# Altium PCB 电机驱动PCB.PcbDoc
Units mm, origin at the board's own origin, x right, y up, seen from the top; angles counter-clockwise.
Board outline 66.29 x 27.3 mm, 4 copper layers (Top, GND02, PWR03, BOTTOM), stack 0.603 mm thick; 45 components, 38 nets, 215 pads, 116 vias.
Unrouted connection lines stored in the file: 1.
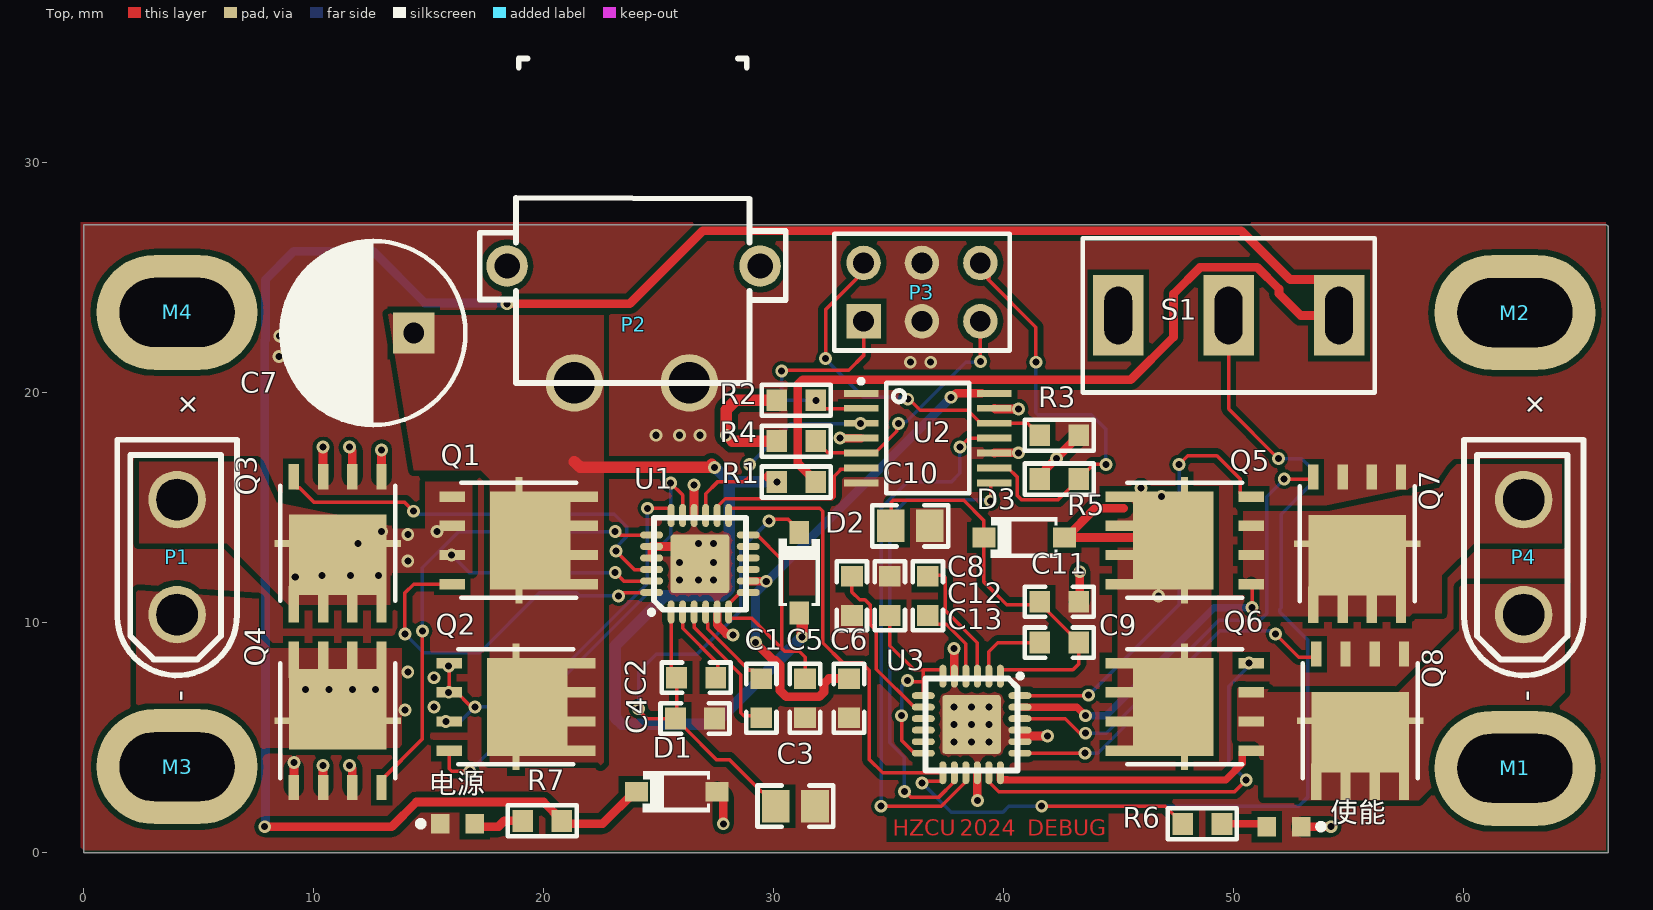
[diagram p0: Top view]
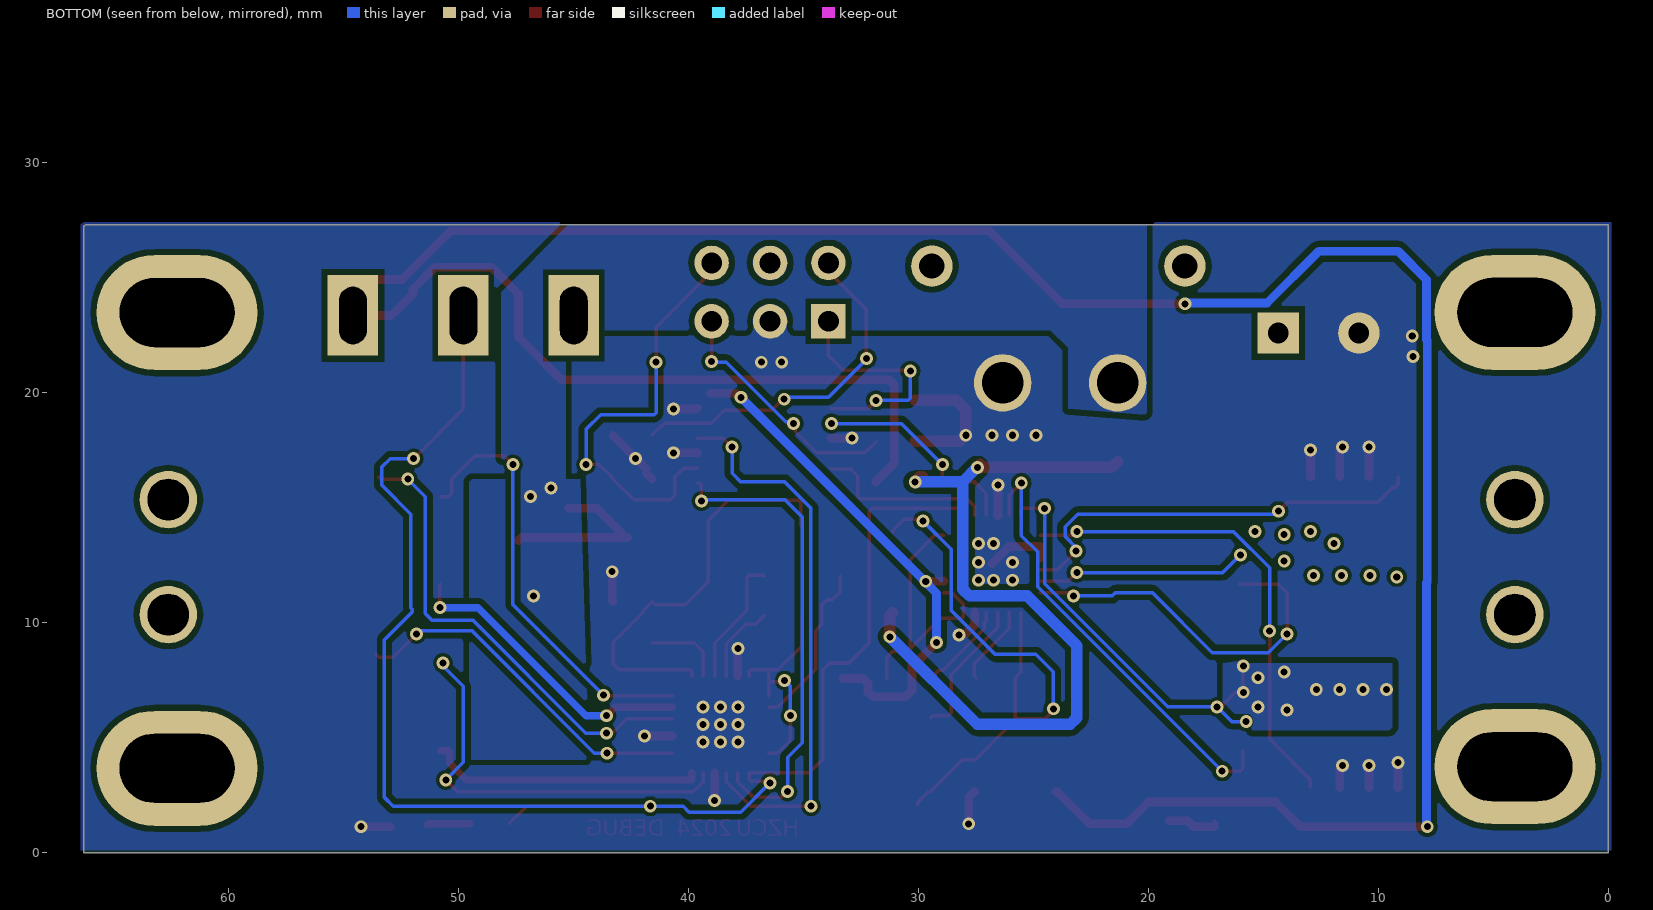
[diagram p1: BOTTOM view, seen from below]
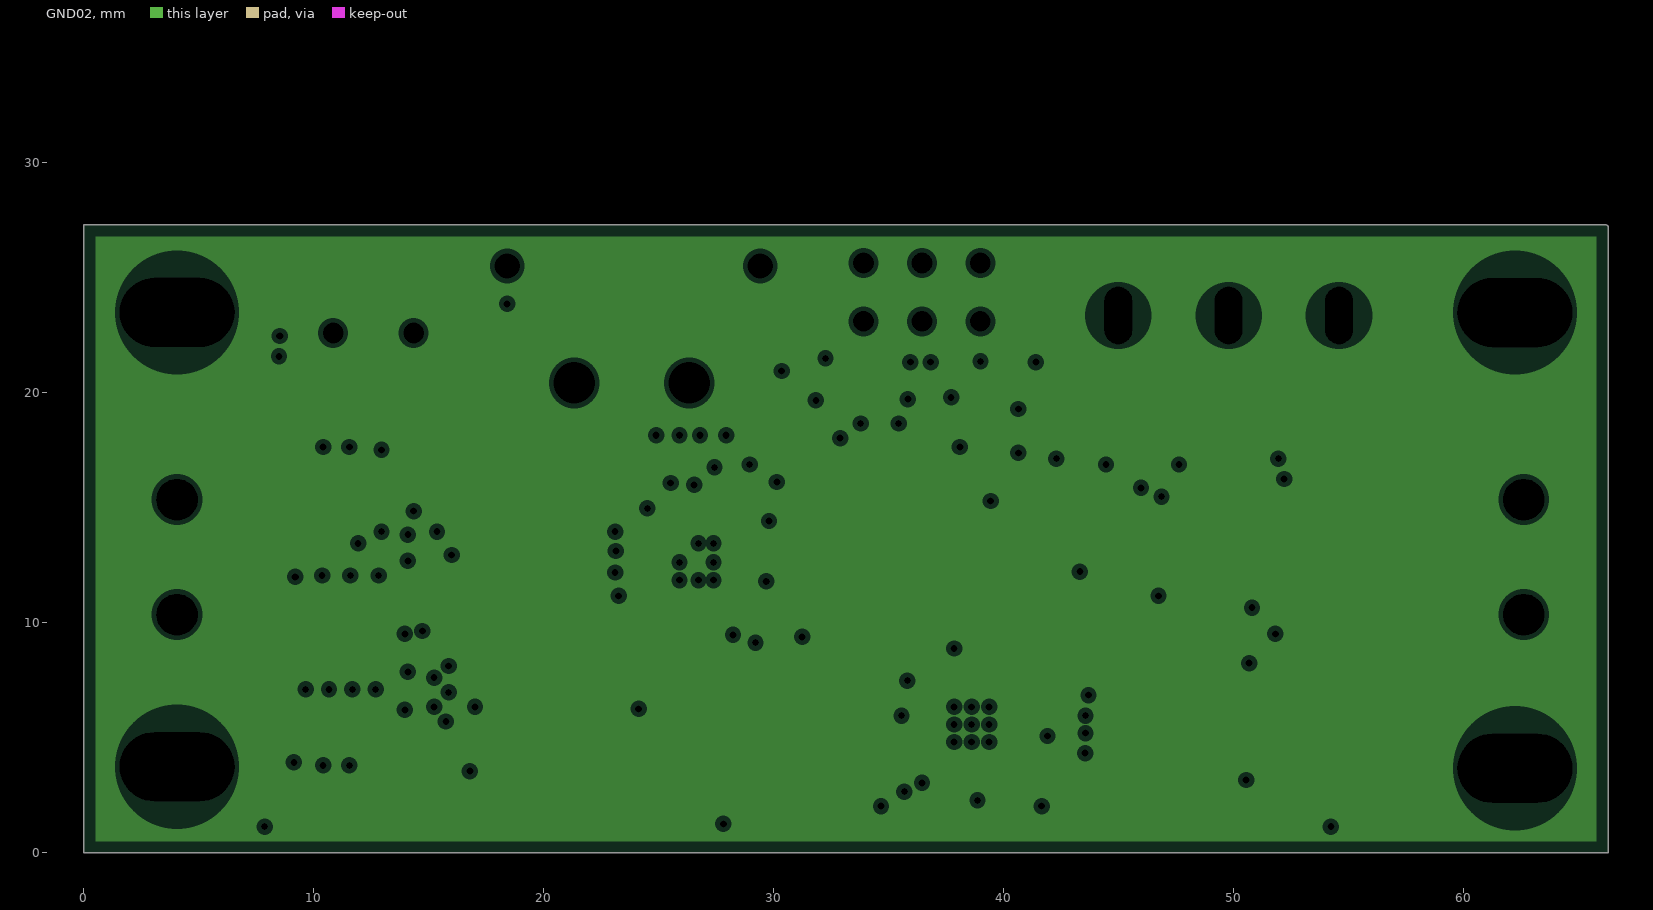
[diagram p2: GND02, clearances drawn from the general rule]
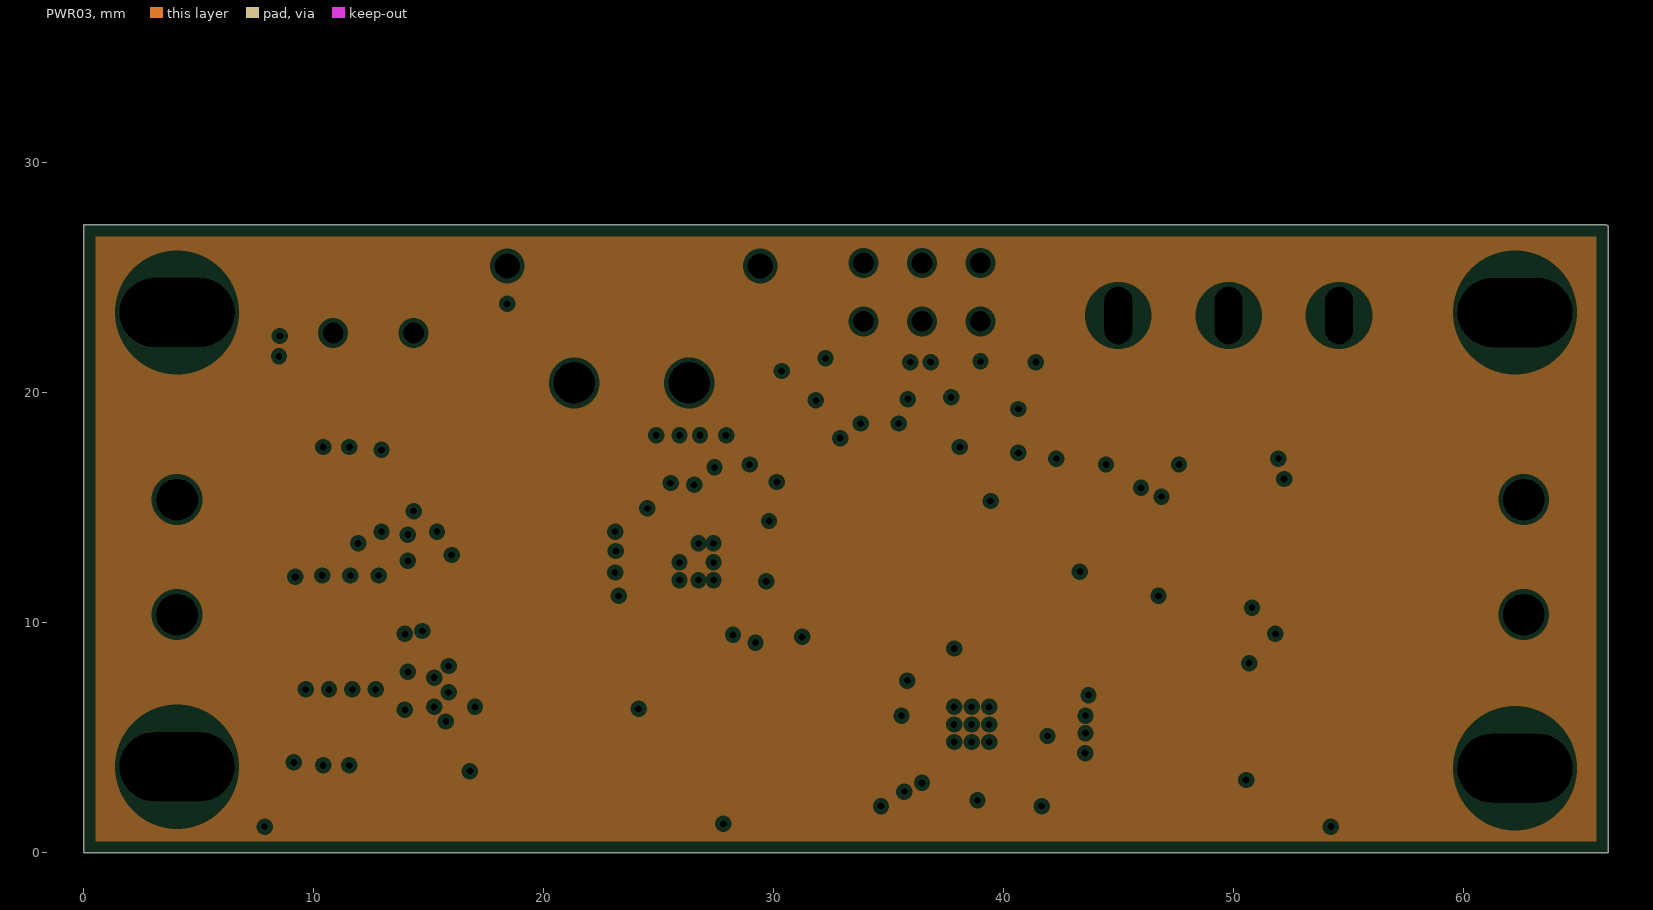
[diagram p3: PWR03, clearances drawn from the general rule]
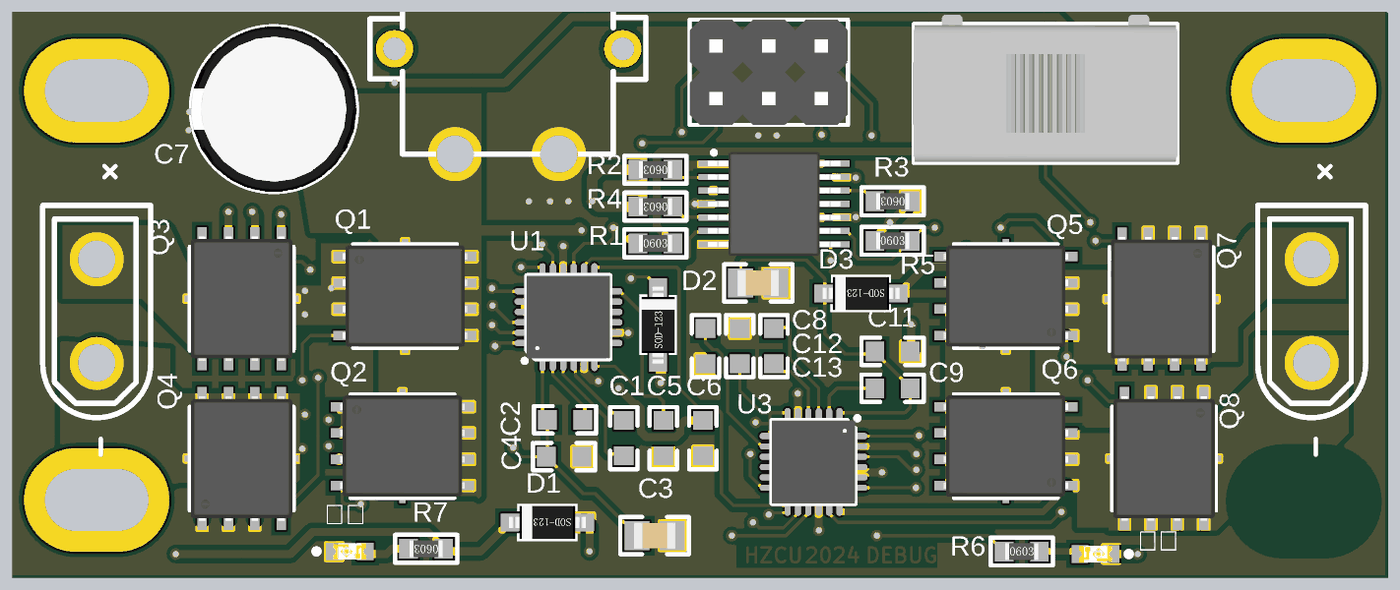
[diagram p4: 3D render of the assembled board from above, using the file's embedded part models]

## Layer stack, top to bottom
Top Solder: solder mask 0.0102, Solder Resist, Dk 3.5
Top: signal copper 0.0356
Dielectric 2: prepreg 0.0711, PP-006, Dk 4.1
GND02: plane copper 0.035
Dielectric 1: dielectric 0.32, FR-4, Dk 4.8
PWR03: plane copper 0.035
Dielectric 3: prepreg 0.0711, PP-006, Dk 4.1
BOTTOM: signal copper 0.0356
Bottom Solder: solder mask 0.0102, Solder Resist, Dk 3.5

## Board outline
0,0 0,27.305 66.19,27.305 66.294,27.25 66.294,0

## Design rules (kind name [scope] priority, off if disabled: settings)
Clearance [All] p1: gap=0.152 ignorepadtopadclearanceinfootprint=TRUE except(0.254: Arc-Fill Arc-Poly Arc-Region Track-Fill Track-Poly Track-Region SMDPad-Fill SMDPad-Poly SMDPad-Region THPad-Fill THPad-Poly THPad-Region Fill-Fill Fill-Poly Fill-Region Poly-Poly Poly-Region Region-Region)
PlaneClearance [All] p1: clearance=0.203
PlaneConnect [All] p1: planeconnectstyle=Relief reliefexpansion=0.508 reliefentries=4 reliefconductorwidth=0.254 reliefairgap=0.254
PolygonConnect [All] p1: connectstyle=Direct reliefconductorwidth=0.254 reliefentries=4 polygonreliefangle="90 Angle" airgapwidth=0.254
RoutingVias [All] p1: holewidth=0.305 width=0.559 viastyle="Through Hole" minholewidth=0.305 minwidth=0.559 maxholewidth=0.305 maxwidth=0.559
SolderMaskExpansion [All] p1: expansion=0.102 istentingtop=FALSE
Width POWER [InNetClass('POWER')] p1: maxlimit=1.524 minlimit=0.254 preferedwidth=0.381 toplayer_minwidth=0.381 minimp=50.000000 maximp=50.000000 favimp=50.000000
Width [All] p2: maxlimit=0.152 minlimit=0.152 preferedwidth=0.152 minimp=50.000000 maximp=50.000000 favimp=50.000000
28 further rules are at their usual default settings.

## Classes and differential pairs
net class POWER: 3V3 +12 DVDD GND
component class 电机驱动原理图: C1 C2 C3 C4 C5 C6 C7 C8 C9 C10 C11 C12 C13 D1 D2 D3 M1 M2 M3 M4 P2 P3 P4 Q3 Q5 Q6 Q7 Q8 R1 R2 R3 R4 R5 R6 R7 S1 U1 U2 U3 使能 电源

## Components (designator, comment, footprint, x,y, rotation, side; value= is the part's Value field where it differs from the comment)
C1 "100nF ±10% 50V" CAPC1608[0603]S-N 29.464,6.731 r270 top value=100nF
C2 "1uF ±10% 25V" CAPC1608[0603]S-N 26.631,7.62 r180 top value=1uF
C3 "10uF ±10% 25V" CAPC2012[0805]S-N 30.949,2.032 r0 top value=10uF
C4 "100nF ±10% 50V" CAPC1608[0603]S-N 26.582,5.842 r0 top value=100nF
C5 "1uF ±10% 25V" CAPC1608[0603]S-N 31.369,6.731 r90 top value=1uF
C6 "1uF ±10% 25V" CAPC1608[0603]S-N 33.274,6.731 r90 top value=1uF
C7 "220uF 25V" CAPPR3.5-8X11.5 12.601,22.606 r180 top value=220uF
C8 "100nF ±10% 50V" CAPC1608[0603]S-N 36.703,11.176 r90 top value=100nF
C9 "1uF ±10% 25V" CAPC1608[0603]S-N 42.418,9.144 r0 top value=1uF
C10 "10uF ±10% 25V" CAPC2012[0805]S-N 35.941,14.224 r0 top value=10uF
C11 "100nF ±10% 50V" CAPC1608[0603]S-N 42.418,10.922 r0 top value=100nF
C12 "1uF ±10% 25V" CAPC1608[0603]S-N 35.052,11.176 r270 top value=1uF
C13 "1uF ±10% 25V" CAPC1608[0603]S-N 33.401,11.176 r90 top value=1uF
D1 "BZT52C3V3" SOD-123-L 25.781,2.667 r180 top
D2 "1N5819" SOD-123-L 31.115,12.192 r90 top
D3 "1N5819" SOD-123-L 40.894,13.716 r180 top
M1 "MountHole" M3-MountSlot#1 -48.522,3.104 r0 top
M2 "MountHole" M3-MountSlot#2 61.794,3.166 r0 top
M3 "MountHole" M3-MountSlot#3 3.628,3.801 r0 top
M4 "MountHole" M3-MountSlot#2 3.628,3.171 r0 top
P1 "" XT30UPB-M 4.064,13.208 r90 top
P2 "" CONN-TH_XT30PW-F 23.876,26.924 r0 top
P3 "Header 3X2" HDR2X3 33.909,23.114 r0 top
P4 "" XT30UPB-M 62.611,13.208 r90 top
Q1 "TPH1R403NL" DFN5x6 18.923,13.589 r270 top
Q2 "TPH1R403NL" DFN5x6 18.796,6.35 r270 top
Q3 "TPH1R403NL" DFN5x6 11.049,13.462 r180 top
Q4 "TPH1R403NL" DFN5x6 11.049,5.75 r0 top
Q5 "TPH1R403NL" DFN5x6 47.871,13.589 r90 top
Q6 "TPH1R403NL" DFN5x6 47.871,6.35 r90 top
Q7 "TPH1R403NL" DFN5x6 55.372,13.445 r180 top
Q8 "TPH1R403NL" DFN5x6 55.499,5.75 r180 top
R1 "2.2K ±1%" RESC1608[0603]S-N 30.988,16.129 r0 top value=2.2K
R2 "10K ±1%" RESC1608[0603]S-N 30.988,19.685 r180 top value=10K
R3 "10K ±1%" RESC1608[0603]S-N 42.418,18.161 r180 top value=10K
R4 "10K ±1%" RESC1608[0603]S-N 30.988,17.907 r180 top value=10K
R5 "10K ±1%" RESC1608[0603]S-N 42.418,16.256 r0 top value=10K
R6 "330R ±1%" RESC1608[0603]S-N 48.641,1.264 r0 top value=330R
R7 "1K ±1%" RESC1608[0603]S-N 19.939,1.397 r180 top value=1K
S1 "SW-SPDT" SS12D10 49.784,23.368 r0 top
U1 "DRV8701E" QFN24-4x4 26.797,12.573 r90 top
U2 "SN74HC125PWR" TSSOP-14 36.703,18.034 r0 top
U3 "DRV8701E" QFN24-4x4 38.608,5.588 r270 top
使能 "Blue" LEDC1608(0603) 52.197,1.143 r180 top (schematic designator LED1)
电源 "Blue" LEDC1608(0603) 16.256,1.27 r0 top (schematic designator LED2)

## Footprints (in the part's own frame and the unit in brackets; to place one, negate y for a bottom-side part, rotate by r counter-clockwise, add the part's x,y. Pads: shape width x height; smd on the part's side, far side on the other; paste and mask are expansions set on the pad)
CAPC1608[0603]S-N [mm]
  rect 0.9x0.95 smd: 1(-0.85,0) 2(0.85,0)
  silkscreen extent -1.5,-0.66 1.5,0.66, body extent -0.8,-0.41 0.8,0.41, height 0.79
CAPC2012[0805]S-N [mm]
  rect 1.2x1.4 smd: 1(-0.85,0) 2(0.85,0)
  silkscreen extent -1.65,-0.9 1.65,0.9, body extent -1,-0.63 1,0.62, height 1.25
CAPPR3.5-8X11.5 [mm]
  rect 1.8x1.8 hole 0.9: 1(-1.75,0)
  round 1.8 hole 0.9: 2(1.75,0)
  silkscreen extent -4,-4.01 4,4, body extent -4,-3.98 4,3.98, height 11.5
CONN-TH_XT30PW-F [mm]
  round 2.5 hole 1.8 paste+0 mask+0.051: 1(-2.54,-6.487) 2(2.46,-6.487)
  round 1.8 hole 1.1 paste+0 mask+0.051: 3(5.539,-1.407) 4(-5.461,-1.407)
  silkscreen extent -6.65,-6.49 6.65,7.61
DFN5x6 [mm]
  rect 0.45x1.6 smd: 1(-1.905,2.65) 1(-0.635,2.65) 1(0.635,2.65) 1(1.905,2.65)
  rect 5.5x0.3 smd: 1(0,0)
  rect 4.25x3.5 smd: 1(0,0.5)
  rect 0.45x1.1 smd: 2(1.905,-2.9) 3(-1.905,-2.9) 3(-0.635,-2.9) 3(0.635,-2.9)
  silkscreen extent -2.5,-2.5 2.5,2.5, body extent -2.45,-3 2.45,3, height 1
HDR2X3 [mm]
  rect 1.5x1.5 hole 0.9: 1(0,0)
  round 1.5 hole 0.9: 2(0,2.54) 3(2.54,0) 4(2.54,2.54) 5(5.08,0) 6(5.08,2.54)
  silkscreen extent -1.27,-1.27 6.35,3.81, body extent -1.27,-1.27 6.35,3.81, height 8.54
LEDC1608(0603) [mm]
  rect 0.8x0.85 smd: A(0.75,0) C(-0.75,0)
  silkscreen extent -1.73,-0.12 -1.48,0.12, body extent -0.8,-0.4 0.8,0.4, height 0.64
M3-MountSlot#1 [mm]
  oval 7x5 hole 3 slot 5 at 0 deg: 1(110.752,0.579)
M3-MountSlot#2 [mm]
  oval 7x5 hole 3 slot 5 at 0 deg: 1(0.436,20.329)
M3-MountSlot#3 [mm]
  oval 7x5 hole 3 slot 5 at 0 deg: 1(0.436,-0.051)
QFN24-4x4 [mm]
  rrect10% 2.55x2.55 smd: 0(0,0)
  oval 1x0.3 smd: 1(-2.1,1.25) 2(-2.1,0.75) 3(-2.1,0.25) 4(-2.1,-0.25) 5(-2.1,-0.75) 6(-2.1,-1.25) 13(2.1,-1.25) 14(2.1,-0.75) 15(2.1,-0.25) 16(2.1,0.25) 17(2.1,0.75) 18(2.1,1.25)
  oval 0.3x1 smd: 7(-1.25,-2.1) 8(-0.75,-2.1) 9(-0.25,-2.1) 10(0.25,-2.1) 11(0.75,-2.1) 12(1.25,-2.1) 19(1.25,2.1) 20(0.75,2.1) 21(0.25,2.1) 22(-0.25,2.1) 23(-0.75,2.1) 24(-1.25,2.1)
  silkscreen extent -2.21,-2 2,2.21, body extent -2,-2 2,2, height 0.9
RESC1608[0603]S-N [mm]
  rect 0.9x0.95 smd: 1(-0.85,0) 2(0.85,0)
  silkscreen extent -1.5,-0.67 1.5,0.67, body extent -0.8,-0.4 0.8,0.4, height 0.45
SOD-123-L [mm]
  rect 1x0.85 smd: A(-1.75,0) K(1.75,0)
  silkscreen extent -1.45,-0.9 1.47,0.9, body extent -1.85,-0.8 1.85,0.8, height 1.2
SS12D10 [mm]
  rect 2.2x3.5 hole 1.2 slot 2.5 at 90 deg mask+0.07: 1(-4.8,0) 2(0,0) 3(4.8,0)
  silkscreen extent -6.35,-3.35 6.35,3.35, body extent -6.4,-3.3 6.35,3.8, height 12.5
TSSOP-14 [mm]
  rect 1.5x0.3 smd mask+0.07: 1(-2.9,1.95) 2(-2.9,1.3) 3(-2.9,0.65) 4(-2.9,0) 5(-2.9,-0.65) 6(-2.9,-1.3) 7(-2.9,-1.95) 8(2.9,-1.95) 9(2.9,-1.3) 10(2.9,-0.65) 11(2.9,0) 12(2.9,0.65) 13(2.9,1.3) 14(2.9,1.95)
  silkscreen extent -2.99,-2.4 1.8,2.57, body extent -3.2,-2.5 3.2,2.5, height 1.13
XT30UPB-M [mm]
  round 2.5 hole 1.8 slot 1.805 at 0 deg paste+0 mask+0.051: 1(2.155,0) 2(-2.845,0)
  silkscreen extent -5.49,-2.6 4.76,2.6

## Part data
C1 C4 C8 C11: library part Cap-Chip_1, "贴片电容", Tolerance=±10%, Voltage=50V, Price(RMB)=0.000, Published=8-Jun-2000, Publisher="Altium Limited", Revision="July-2002: Re-released for DXP Platform."
C2 C5 C6 C9 C12 C13: library part Cap-Chip_2, "贴片电容", Tolerance=±10%, Voltage=25V, Price(RMB)=0.000, Published=8-Jun-2000, Publisher="Altium Limited", Revision="July-2002: Re-released for DXP Platform."
C3 C10: library part Cap-Chip, "贴片电容", Tolerance=±10%, Voltage=25V, Price(RMB)=0.000, Published=8-Jun-2000, Publisher="Altium Limited", Revision="July-2002: Re-released for DXP Platform."
C7: library part Cap-Elect, "Polarized Capacitor (Radial)", Voltage=25V, Price(RMB)=0.000, Published=8-Jun-2000, Publisher="Altium Limited", Revision="July-2002: Re-released for DXP Platform."
D1: library part "Diode Zen", "3.3V稳压二极管 SOD-123", Price(RMB)=0.000, Published=8-Jun-2000, Publisher="Altium Limited", Revision="July-2002: Re-released for DXP Platform."
D2 D3: library part "Diode Schottky", "肖特基二极管 Diode", Imax=500mA, PartNumber=1N5819, Price(RMB)=0.000, Published=8-Jun-2000, Publisher="Altium Limited", Revision="July-2002: Re-released for DXP Platform."
M1 M2 M3 M4: "固定孔"
P1 P4: library part XT30, "电机接口"
P2: library part XT30PW-F, "XT30电源接口"
P3: "Header, 3-Pin, Dual row", LatestRevisionDate=17-Jul-2002, LatestRevisionNote="Re-released for DXP Platform.", Price(RMB)=0.00, Publisher="Altium Limited"
Q1 Q2 Q3 Q4 Q5 Q6 Q7 Q8: "东芝 N沟 MOS"
R1: library part Res-Chip, "贴片电阻", Tolerance=±1%, Price(RMB)=0.000, Published=8-Jun-2000, Publisher="Altium Limited", Revision="July-2002: Re-released for DXP Platform."
R2 R3 R4 R5: library part Res-Chip_1, "贴片电阻", Tolerance=±1%, Price(RMB)=0.000, Published=8-Jun-2000, Publisher="Altium Limited", Revision="July-2002: Re-released for DXP Platform."
R6: library part Res-Chip_3, "贴片电阻", Tolerance=±1%, Price(RMB)=0.000, Published=8-Jun-2000, Publisher="Altium Limited", Revision="July-2002: Re-released for DXP Platform."
R7: library part Res-Chip_2, "贴片电阻", Tolerance=±1%, Price(RMB)=0.000, Published=8-Jun-2000, Publisher="Altium Limited", Revision="July-2002: Re-released for DXP Platform."
S1: "单刀双掷开关 3脚船型、钮子、拨动开关 SPDT Subminiature Toggle Switch", Price(RMB)=0.000, Published=24-Mar-1999, Publisher="Altium Limited"
U1 U3: "DRV8701E Ti全桥驱动芯片"
U2: "三态输出的四路缓冲器 TSSOP-20"
使能 电源: library part "LED Chip Blue", "Typical Chip LED", Color=Blue, Price(RMB)=0.00, Published=8-Jun-2000, Publisher="Altium Limited", Revision="July-2002: Re-released for DXP Platform."

## Via types
v1: diameter 0.559, hole 0.305, Top to BOTTOM, tented both sides, 116 vias

## Nets (pads, with @x,y where several pads share a name; then routed paths per layer and width w, separated by ;. In a path a pad name is that pad's centre, name@x,y a point inside that pad or via, vN(x,y) a via of type N, cw(c..) or ccw(c..) an arc to the next point about the centre after c; other vN are vias at no path point)
3V3: D1.K R1.2 R7.1 S1.3 | length 125.1
  Top w0.381: v1(7.874,1.143) 13.399,1.143 14.471,2.215 19.996,2.215 20.789,1.422 R7.1 20.916,1.27 22.559,1.27 23.956,2.667 D1.K ; v1(18.415,23.876) 23.749,23.876 26.924,27.051 50.334,27.051 52.457,24.928 53.675,24.928 54.584,24.018 S1.3 52.913,23.368 51.969,24.311 51.969,24.518 51.026,25.461 48.542,25.461 47.384,24.303 47.384,22.433 45.525,20.574 31.268,20.574 31.045,20.351 31.045,16.947 31.838,16.154 R1.2
  BOTTOM w0.381: v1(7.874,1.143) 7.907,1.176 7.907,11.741 7.874,11.774 7.874,22.29 7.907,22.322 7.907,24.925 9.144,26.162 12.592,26.162 14.846,23.908 18.383,23.908 v1(18.415,23.876)
+12: C7.1 D2.A D3.A P2.1 Q1.1 Q2.1 Q5.1 Q6.1 R1.1 | length 42.8
  Top w0.381: D3.A D3.A@42.719,13.716 ; 45.212,14.986 43.989,14.986 D3.A@42.719,13.716 ; Q5.1@47.371,13.589 47.244,13.716 D3.A@42.719,13.716
  Top w0.5: 21.336,17.018 21.59,16.764 v1(27.432,16.764) v1@27.305,16.891 ; P2.1 P2.1@21.695,20.078 ; R1.1@29.801,16.354 29.938,16.354 30.138,16.154 v1(30.138,16.129) ; D2.A 31.242,10.315 v1(31.242,9.398)
  BOTTOM w0.5: v1(27.432,16.764) 27.448,16.764 28.083,16.129 ; v1(30.138,16.129) 28.083,16.129 ; v1(31.242,9.398) 27.432,5.588 23.407,5.588 23.114,5.881 23.114,9.017 25.273,11.176 27.774,11.176 28.067,11.469 28.067,16.113 28.083,16.129
  other v1: 46.736,11.176 46.863,15.494 45.974,15.875
DVDD: C6.2 U1.8 U2.14 | length 22.6
  Top w0.381: U1.8 28.904,11.816 29.675,11.816 v1(29.68,11.811) ; v1(29.21,9.144) 29.98,8.374 30.081,8.374 30.282,8.173 30.282,7.056 30.55,6.788 31.986,6.788 32.187,6.989 32.187,7.358 32.41,7.581 C6.2 ; v1(37.719,19.812) 37.767,19.812 37.939,19.984 U2.14@39.043,19.984
  BOTTOM w0.381: v1(29.21,9.144) 29.21,11.293 29.68,11.763 v1(29.68,11.811) 29.718,11.811 v1(37.719,19.812)
GND: C3.2 C4.2 C5.1 C6.1 C7.2 C10.2 C11.2 C12.1 C13.1 D1.A P2.2 P3.3 P3.4 Q3.3 Q4.3 Q7.3 Q8.3 R2.2 R3.1 R4.2 R5.1 U1.0 U1.5 U1.16 U1.20 U1.21 U2.1 U2.4 U2.7 U2.10 U2.13 U3.0 U3.5 U3.16 U3.20 U3.21 使能.C 电源.C | length 31.4
  Top w0.381: Q4.3@9.144,2.85 v1@9.144,3.683 ; Q4.3@10.414,2.85 v1(10.414,3.81) ; Q3.3@10.414,16.362 v1(10.414,17.653) ; v1(11.557,3.81) 11.684,3.683 Q4.3@11.684,2.85 ; v1(11.557,17.653) 11.557,17.605 11.684,17.478 Q3.3@11.684,16.362 ; Q3.3@12.954,16.362 v1(12.954,17.526) ; U1.21 U1.20 26.047,13.323 U1.0 ; v1(26.543,16.002) 26.543,14.677 U1.16 ; D1.A 27.578,2.667 27.813,2.432 v1(27.813,1.27) ; U1.5 27.554,10.466 27.554,9.919 27.956,9.517 28.202,9.517 v1(28.236,9.483) ; v1(32.893,18.034) U2.4 ; v1(37.846,8.89) 37.858,8.878 U3.5 ; U3.16 38.858,2.29 v1(38.862,2.286) ; U2.10 39.618,17.399 v1(40.64,17.399) ; U2.13 39.633,19.304 v1(40.64,19.304) ; 40.708,5.088 41.902,5.088 v1@41.91,5.08 ; R5.1 41.828,16.516 41.828,16.696 43.268,18.136 R3.1 ; C11.2 43.311,10.965 v1(43.311,12.227) ; 使能.C v1(54.229,1.143)
  Top w0.5: R4.2 28.21,17.907 27.956,18.161 v1(27.94,18.161) 27.94,19.265 28.36,19.685 R2.2
  other v1: 9.144,3.937 37.846,4.826 38.608,4.826 39.37,4.826 41.906,5.084 37.846,5.588 38.608,5.588 39.37,5.588 37.846,6.35 38.608,6.35 39.37,6.35 25.908,11.858 26.733,11.858 27.385,11.858 25.908,12.636 27.385,12.636 26.733,13.462 27.385,13.462 42.291,17.145 24.892,18.161 25.908,18.161 26.797,18.161 35.941,21.336 36.83,21.336 8.496,21.59 8.529,22.479
L_A: P1.1 Q1.3 Q3.1 U1.23 | length 9.2
  Top w0.152: v1(23.114,12.192) 23.483,11.823 U1.23
  BOTTOM w0.152: v1(16.002,12.954) 16.764,12.192 v1(23.114,12.192)
  other v1: 9.203,12.006 10.372,12.065 11.599,12.065 12.827,12.065 14.097,12.7 11.938,13.462 14.097,13.843 12.954,13.97 15.367,13.97
L_B: P1.2 Q2.3 Q4.1 U1.18 | length 18.4
  Top w0.152: Q2.3@15.896,8.255 15.896,7.134 16.045,6.985 16.221,6.985 16.778,6.428 16.94,6.428 v1(17.018,6.35) ; v1(24.511,14.986) 25.479,14.986 25.547,14.918 U1.18
  BOTTOM w0.152: v1(15.748,5.715) 16.383,5.715 v1(17.018,6.35) 19.153,6.35 24.511,11.708 v1(24.511,14.986)
  other v1: 13.97,6.223 15.24,6.35 15.875,6.985 9.652,7.112 10.668,7.112 11.684,7.112 12.7,7.112 15.24,7.62 14.097,7.874 15.875,8.128
L_EN: U1.14 U2.6 | length 7.9
  Top w0.152: U1.14 27.547,15.058 27.89,15.402 32.547,15.402 32.639,15.494 32.639,16.383 32.893,16.637 32.893,16.675 33.744,16.675 U2.6
L_EN_IN: P3.5 R4.1 U2.5 | length 10.5
  Top w0.152: R4.1 31.838,17.882 32.212,17.508 32.237,17.508 32.346,17.399 34.418,17.399 35.355,18.336 35.355,18.591 v1(35.433,18.669) ; P3.5@38.989,22.733 38.993,22.729 38.993,21.378 v1(38.997,21.374)
  BOTTOM w0.152: v1(35.433,18.669) 35.511,18.747 35.765,18.747 38.354,21.336 38.959,21.336 v1(38.997,21.374)
L_PH: U1.15 U2.3 | length 9.2
  Top w0.152: U1.15 27.047,15.617 27.559,16.129 28.702,16.129 28.956,16.383 v1(28.956,16.891)
  BOTTOM w0.152: v1(28.956,16.891) 30.734,18.669 v1(33.782,18.669)
L_PH_IN: P3.1 R2.1 U2.2 | length 10.2
  Top w0.152: v1(30.353,20.955) 30.391,20.993 33.274,20.993 33.909,21.628 P3.1 ; R2.1 v1(31.838,19.678) 32.212,19.304 33.773,19.304 U2.2
  BOTTOM w0.152: v1(30.353,20.955) 30.353,19.767 30.442,19.678 v1(31.838,19.678)
NetC1_1: C1.1 U1.4 | length 4
  Top w0.152: U1.4 27.047,10.083 27.135,9.995 27.135,9.745 28.03,8.85 28.925,7.955 29.09,7.955 C1.1
NetC1_2: C1.2 U1.3 | length 6.2
  Top w0.152: U1.3 26.547,9.802 28.16,8.19 28.16,8.162 28.575,7.747 28.575,6.096 28.702,5.969 29.376,5.969 C1.2
NetC2_1: C2.1 U1.2 | length 3.5
  Top w0.152: U1.2 26.047,9.767 27.58,8.234 27.58,7.719 C2.1
NetC2_2: C2.2 C3.1 C4.1 D2.K U1.1 | length 25.7
  Top w0.152: v1(24.13,6.27) 24.13,6.206 24.494,5.842 C4.1 ; U1.1 25.547,7.854 C2.2 25.781,5.866 25.732,5.817 26.106,5.443 26.131,5.443 27.51,4.064 28.067,4.064 29.475,2.656 29.575,2.656 30.035,2.195 C3.1@30.035,2.095 ; v1(29.802,14.435) 29.885,14.518 30.614,14.518 31.115,14.017 D2.K
  BOTTOM w0.152: v1(24.13,6.27) 24.13,7.874 24.892,8.636 26.67,8.636 28.575,10.541 28.575,13.208 v1(29.802,14.435)
NetC5_2: C5.2 U1.6 U1.7 U1.12 | length 12.4
  Top w0.152: U1.7 28.547,11.323 28.047,10.823 U1.6 28.047,10.267 28.115,10.199 29.044,10.199 30.353,8.89 ; U1.12 29.282,13.823 30.353,12.752 30.353,8.89 ; U1.7@29.103,11.323 U1.7@29.171,11.255 ; C5.2 31.369,8.509 31.115,8.763 30.48,8.763 30.353,8.89
NetC8_1: C8.1 U3.4 | length 3.6
  Top w0.152: C8.1 37.077,9.952 37.502,9.952 38.358,9.096 U3.4
NetC8_2: C8.2 U3.3 | length 5.7
  Top w0.152: C8.2 36.742,12.065 37.376,12.065 37.465,11.976 37.465,10.541 38.858,9.148 U3.3
NetC9_1: C9.1 U3.2 | length 3.4
  Top w0.152: U3.2 39.358,8.751 39.751,9.144 C9.1
NetC9_2: C9.2 C10.1 C11.1 D3.K U3.1 | length 18.2
  Top w0.152: C10.1 35.105,14.238 35.105,15.24 35.194,15.329 38.265,15.329 39.144,14.45 D3.K 39.144,11.783 40.132,10.795 41.441,10.795 C11.1 41.942,10.548 41.942,10.495 43.268,9.169 C9.2 43.268,8.216 43.014,7.962 39.926,7.962 39.858,7.894 U3.1
NetC12_2: C12.2 U3.6 U3.7 U3.12 | length 10
  Top w0.152: C12.2 35.052,9.017 36.107,7.962 36.449,7.962 ; v1(35.56,5.969) 35.56,4.901 36.123,4.338 U3.12 ; v1(35.814,7.493) 35.867,7.44 36.508,7.44 ; U3.7 36.508,7.44 ; 36.515,7.44 36.508,7.44 ; U3.6 37.358,7.894 37.29,7.962 36.449,7.962 ; 36.449,7.962 36.508,7.903 36.508,7.44
  BOTTOM w0.152: v1(35.56,5.969) 35.56,7.239 v1(35.814,7.493)
NetC13_2: C13.2 U3.8 | length 7.3
  Top w0.152: C13.2 33.401,11.347 33.744,11.005 33.971,11.005 34.191,10.784 34.191,9.939 34.468,9.662 34.468,7.993 36.123,6.338 U3.8
NetLED1_A: R6.2 使能.A | length 2
  Top w0.152: 使能.A@51.326,1.264 使能.A
  Top w0.32: R6.2 使能.A@51.326,1.264
NetLED2_A: R7.2 电源.A | length 2.4
  Top w0.152: 电源.A@17.133,1.143 电源.A 电源.A@17.133,1.397
  Top w0.381: 电源.A@17.133,1.143 18.034,1.143 18.288,1.397 R7.2
NetQ1_2: Q1.2 U1.24 | length 16.3
  Top w0.152: v1(13.97,9.525) 13.97,11.303 14.351,11.684 Q1.2 ; v1(23.261,11.176) 23.261,11.234 23.35,11.323 U1.24
  BOTTOM w0.152: v1(13.97,9.525) 14.785,8.71 17.219,8.71 19.832,11.323 21.418,11.323 21.565,11.176 v1(23.261,11.176)
NetQ2_2: Q2.2 U1.17 | length 19.5
  Top w0.152: Q2.2 15.896,3.662 16.002,3.556 v1(16.79,3.556) ; v1(25.527,16.082) 26.047,15.562 U1.17
  BOTTOM w0.152: v1(16.79,3.556) 24.816,11.581 24.816,13.088 25.527,13.799 v1(25.527,16.082)
NetQ3_2: Q3.2 U1.22 | length 18.7
  Top w0.152: Q3.2 9.144,16.037 9.293,15.888 9.385,15.888 10.033,15.24 13.97,15.24 v1(14.351,14.859) ; v1(23.14,13.13) 23.947,12.323 U1.22
  BOTTOM w0.152: v1(14.351,14.859) 14.478,14.732 23.07,14.732 23.622,14.18 23.622,13.76 23.14,13.278 v1(23.14,13.13)
NetQ4_2: Q4.2 U1.19 | length 21
  Top w0.152: Q4.2 12.954,3.175 14.732,4.953 v1(14.732,9.652) ; v1(23.114,13.97) 23.261,13.823 U1.19
  BOTTOM w0.152: v1(14.732,9.652) 14.732,12.402 16.3,13.97 v1(23.114,13.97)
NetQ5_2: Q5.2 U3.24 | length 19
  Top w0.152: U3.24 43.668,6.838 v1(43.688,6.858) ; v1(47.625,16.891) 48.006,17.272 49.276,17.272 50.297,16.251 50.297,15.643 50.446,15.494 Q5.2
  BOTTOM w0.152: v1(43.688,6.858) 47.625,10.795 v1(47.625,16.891)
NetQ6_2: Q6.2 U3.17 | length 17.7
  Top w0.152: U3.17 39.358,3.103 39.794,2.667 50.038,2.667 v1(50.546,3.175)
  BOTTOM w0.152: v1(50.546,3.175) 49.784,3.937 49.784,7.256 50.673,8.145 v1(50.673,8.255)
NetQ7_2: Q7.2 U3.22 | length 20.6
  Top w0.152: U3.22 42.676,5.838 43.307,5.207 v1(43.561,5.207) ; v1(52.197,16.256) 53.378,16.256 Q7.2
  BOTTOM w0.152: v1(43.561,5.207) 44.459,5.207 49.381,10.128 51.149,10.128 51.435,10.414 51.435,15.494 v1(52.197,16.256)
NetQ8_2: Q8.2 U3.19 | length 15.6
  Top w0.152: U3.19 v1(43.541,4.338) v1@43.561,4.318 ; v1(51.816,9.525) 52.832,8.509 53.453,8.509 Q8.2
  BOTTOM w0.152: v1(43.541,4.338) 44.089,4.338 49.403,9.652 51.689,9.652 v1(51.816,9.525)
nSLEEP: R6.1 S1.2 U1.13 U3.13 | length 69.3
  Top w0.152: U1.13 28.047,14.918 28.115,14.986 32.004,14.986 32.131,14.859 32.131,9.144 33.015,8.26 33.844,8.26 34.163,7.94 34.163,4.064 34.739,3.488 U3.13 37.358,3.194 37.29,3.126 36.527,3.126 v1(36.449,3.048) ; v1(41.656,2.032) 47.023,2.032 47.392,1.663 47.417,1.663 47.791,1.289 R6.1 ; S1.2 49.784,19.304 v1(51.943,17.145)
  BOTTOM w0.152: v1(36.449,3.048) 37.719,1.778 39.972,1.778 40.226,2.032 v1(41.656,2.032) 52.832,2.032 53.213,2.413 53.213,9.271 52.006,10.478 52.006,10.604 52.07,10.668 52.07,14.732 53.34,16.002 53.34,16.764 52.959,17.145 v1(51.943,17.145)
R_A: P4.1 Q5.3 Q7.1 U3.23 | length 13.2
  Top w0.152: Q5.3@50.771,11.684 50.8,11.655 v1(50.8,10.668)
  Top w0.32: U3.23 43.192,6.338 v1(43.561,5.969)
  BOTTOM w0.32: v1(43.561,5.969) 44.45,5.969 49.149,10.668 v1(50.8,10.668)
R_B: P4.2 Q6.3 Q8.1 U3.18 | length 12
  Top w0.32: U3.18 39.858,3.19 39.868,3.18 40.166,3.18 40.171,3.175 49.657,3.175 50.381,3.899 50.381,4.38 50.446,4.445 Q6.3@50.771,4.445
R_EN: U2.8 U3.14 | length 20.9
  Top w0.152: v1(35.687,2.667) 35.725,2.667 35.979,2.413 37.168,2.413 37.858,3.103 U3.14 ; v1(39.433,15.303) 39.433,16.01 39.507,16.084 U2.8
  BOTTOM w0.152: v1(35.687,2.667) 35.687,4.161 35.052,4.796 35.052,14.605 35.814,15.367 39.37,15.367 v1(39.433,15.303) v1@39.497,15.24
R_EN_IN: P3.6 R5.2 U2.9 | length 18.9
  Top w0.152: P3.6 38.989,25.4 P3.6@39.37,25.019 ; 39.306,24.956 41.402,22.86 v1(41.402,21.336) ; U2.9 40.203,16.734 40.582,16.355 40.582,15.552 40.767,15.367 42.379,15.367 42.869,15.857 42.894,15.857 43.268,16.231 R5.2 43.268,16.281 43.642,16.655 43.667,16.655 43.903,16.891 v1(44.45,16.891)
  BOTTOM w0.152: v1(41.402,21.336) 41.402,19.139 41.491,19.05 43.815,19.05 44.45,18.415 v1(44.45,16.891)
R_PH: U2.11 U3.15 | length 24.3
  Top w0.152: v1(34.671,2.032) 37.287,2.032 38.358,3.103 U3.15 ; v1(38.1,17.653) 38.481,18.034 U2.11
  BOTTOM w0.152: v1(34.671,2.032) 34.671,14.986 35.814,16.129 37.719,16.129 38.1,16.51 v1(38.1,17.653)
R_PH_IN: P3.2 R3.2 U2.12 | length 15.6
  Top w0.152: v1(32.258,21.501) 32.258,23.622 33.655,25.019 33.655,25.4 P3.2 ; v1(35.834,19.727) 35.899,19.727 36.38,19.246 38.441,19.246 39.003,18.684 U2.12 41.045,18.684 41.169,18.56 41.194,18.56 41.568,18.186 R3.2
  BOTTOM w0.152: v1(32.258,21.501) 32.258,21.463 33.909,19.812 35.749,19.812 v1(35.834,19.727)
pads on no net: M1.1 M2.1 M3.1 M4.1 P2.3 P2.4 S1.1 U1.9 U1.10 U1.11 U3.9 U3.10 U3.11

## Polygon pours and split planes (outlines as drawn)
GND on Top "GND_L01_P072" (solid, pour order 72): -0.127,27.432 66.167,27.432 66.167,0.127 0,0.127 -0.127,0.254
+12 on Top "+12_L01_P056" (solid, pour order 56): 13.208,23.622 13.462,23.368 22.606,23.368 22.606,3.937 22.479,3.81 22.352,3.937 17.653,3.937 17.653,16.256 17.272,16.637 14.351,16.637
+12 on Top "+12_L01_P058" (solid, pour order 58): 44.958,15.621 48.895,15.621 49.022,15.494 49.022,4.318 44.831,4.318 44.958,4.445
R_B on Top "R_B_L01_P054" (solid, pour order 54): 50.771,6.985 54.229,6.985 54.229,2.286 54.102,2.413 51.308,2.413 51.308,4.064 50.292,4.064 50.165,4.191 50.165,7.239 52.832,6.985
L_A on Top "L_A_L01_P046" (solid, pour order 46): 9.144,12.065 13.392,12.065 13.392,14.224 9.144,14.224
L_A on Top "L_A_L01_P047" (solid, pour order 47): 16.891,16.129 16.891,12.192 12.319,12.192 12.573,12.446 12.573,14.097 14.859,14.097 14.859,16.129
GND on Top "GND_L01_P070" (solid, pour order 70): 35.56,26.543 37.465,26.543 37.465,21.082 35.687,21.082 35.56,21.082
R_A on Top "R_A_L01_P051" (solid, pour order 51): 50.419,14.859 57.277,14.859 57.277,10.287 57.15,10.16 57.023,10.287 50.419,10.287
GND on Top "GND_L01_P071" (solid, pour order 71): 24.384,22.098 28.829,22.098 28.829,17.399 24.384,17.399
GND on Top "GND_L01_P060" (solid, pour order 60): 12.192,23.368 12.192,21.463 11.811,21.082 11.684,21.209 7.62,21.209 7.62,23.622 7.874,23.876 12.065,23.876
L_B on Top "L_B_L01_P048" (solid, pour order 48): 2.286,11.43 2.286,4.191 6.731,4.191 8.001,4.572 13.716,4.572 13.843,4.699 13.843,8.89 8.128,8.89 7.62,9.398 7.62,11.049
R_B on Top "R_B_L01_P050" (solid, pour order 50): 52.832,6.985 57.15,6.985 59.817,9.652 59.817,11.557 59.944,11.684 64.389,11.684 64.389,6.985 63.881,6.477 64.643,2.667 58.674,2.921 58.039,2.286 52.832,2.286
R_A on Top "R_A_L01_P049" (solid, pour order 49): 64.262,16.891 59.69,16.891 59.436,16.637 58.928,15.875 53.467,14.732 53.213,14.605 52.959,14.351 52.959,10.287 57.658,10.287 57.785,10.414 59.055,10.414 59.055,12.065 60.452,13.462 64.262,13.462
L_A on Top "L_A_L01_P045" (solid, pour order 45): 2.413,17.018 7.493,17.018 7.62,16.891 8.382,15.24 13.335,14.224 13.335,10.795 8.89,10.795 6.223,13.462 2.413,13.462
+12 on BOTTOM "+12_L04_P055" (solid, pour order 55): 44.704,16.256 49.403,16.256 49.53,16.129 49.53,4.064 44.323,4.064
+12 on BOTTOM "+12_L04_P059" (solid, pour order 59): 20.066,19.05 20.066,27.305 45.212,27.305 48.133,24.384 48.133,14.986 45.212,14.986 45.339,15.113 45.339,22.733 24.257,22.733 23.495,21.971 23.495,19.304
GND on BOTTOM "GND_L04_P064" (solid, pour order 64): -0.127,27.432 66.294,27.432 66.421,27.305 66.421,0.127 -0.127,0.127
L_B on BOTTOM "L_B_L04_P057" (solid, pour order 57): 15.875,8.382 15.748,8.255 9.398,8.255 9.398,5.461 9.525,5.334 16.764,5.334 16.764,8.255
no net on GND02 (split plane): 65.784,0.51 0.51,0.51 0.51,26.795 65.784,26.795
no net on PWR03 (split plane): 65.784,0.51 0.51,0.51 0.51,26.795 65.784,26.795

## Other copper
Top:
  text "HZCU" at 35.177,0.747 h0.7
  text "2024" at 38.098,0.747 h0.7
  text "DEBUG" at 41.037,0.747 h0.7

## Silkscreen, mask and mechanical layers (free items; w line width, h text height)
Mechanical 1:
  lines w0.254: 0,27.25 0,0 66.19,0 ; 0,27.305 66.19,27.305 ; 66.294,0 66.294,27.25

## Dimensions
0,0 to 0,27.305 on Mechanical 1
0,0 to 66.19,0 on Mechanical 1

## Text inside footprints (layer, text, board x,y; h text height)
P1: Top Overlay "-" at 3.869,7.072 h1 r270; Top Overlay "+" at 4.446,18.784 h1 r45
P4: Top Overlay "-" at 62.416,7.072 h1 r270; Top Overlay "+" at 62.993,18.784 h1 r45